# EAGLE board Exquisite Bombul-Kieran (EAGLE 9.7.0)

Size 82.4 x 356.69 mm. Coordinates in mm from the lower left corner, seen from the top.
Outline: 0,0 82.4,0 82.4,356.69 0,356.69 0,0
Copper layers (1*16): Top 0.035mm / dielectric 1.5mm / Bottom 0.035mm
Design rules "default": minimum track width 6mil, minimum drill 0.35mm, track to track 6mil, track to pad 6mil, pad to pad 6mil, via to via 6mil, smd to smd 6mil, copper to edge 40mil, drill to drill 6mil, minimum pad ring 10mil, minimum via ring 8mil, stop-mask expansion 4mil, vias tented up to drill 0mil, thermal gap 10mil

## Footprints (pad centres in the part's own frame; a part is rotated, then mirrored left to right if it is on the bottom)
LED-RGB-5MM = drill 0.9: B 0.635,0.635; C -0.635,-0.635; G 1.905,-0.635; R -1.905,0.635
RESAD1016W63L850D250B = drill 0.83 pad 1.43: 1 -5.08,0; 2 5.08,0
ARDUINO-UNO-R3-SHIELD = drill 1.016 pad 1.88: 3.3V 24.13,-2.54; 5V 24.13,0; A0 24.13,12.7; A1 24.13,15.24; A2 24.13,17.78; A3 24.13,20.32; A4 24.13,22.86; A5 24.13,25.4; AREF -24.13,-13.97; D2 -24.13,20.32; D3 -24.13,17.78; D4 -24.13,15.24; D5 -24.13,12.7; D6 -24.13,10.16; D7 -24.13,7.62; D8 -24.13,3.81; D9 -24.13,1.27; D10 -24.13,-1.27; D11 -24.13,-3.81; D12 -24.13,-6.35; D13 -24.13,-8.89; GND@0 24.13,2.54; GND@1 24.13,5.08; GND@2 -24.13,-11.43; IOREF 24.13,-7.62; NC 24.13,-10.16; RES 24.13,-5.08; RX -24.13,25.4; SCL -24.13,-19.05; SDA -24.13,-16.51; TX -24.13,22.86; VIN 24.13,7.62

## Placement (x,y rotation side)
D1  LED-RGBRCBG-PTH  [LED-RGB-5MM]  40.21,127.54 0 top
D2  LED-RGBRCBG-PTH  [LED-RGB-5MM]  30.05,125 0 top
D3  LED-RGBRCBG-PTH  [LED-RGB-5MM]  50.37,125 0 top
D4  LED-RGBRCBG-PTH  [LED-RGB-5MM]  19.89,122.46 0 top
D5  LED-RGBRCBG-PTH  [LED-RGB-5MM]  60.53,122.46 0 top
D6  LED-RGBRCBG-PTH  [LED-RGB-5MM]  39.81,182.43 0 top
D7  LED-RGBRCBG-PTH  [LED-RGB-5MM]  29.65,179.89 0 top
D8  LED-RGBRCBG-PTH  [LED-RGB-5MM]  49.97,179.89 0 top
D9  LED-RGBRCBG-PTH  [LED-RGB-5MM]  19.49,177.35 0 top
D10  LED-RGBRCBG-PTH  [LED-RGB-5MM]  60.13,177.35 0 top
D11  LED-RGBRCBG-PTH  [LED-RGB-5MM]  39.56,238.17 0 top
D12  LED-RGBRCBG-PTH  [LED-RGB-5MM]  29.4,235.63 0 top
D13  LED-RGBRCBG-PTH  [LED-RGB-5MM]  49.72,235.63 0 top
D14  LED-RGBRCBG-PTH  [LED-RGB-5MM]  19.24,233.09 0 top
D15  LED-RGBRCBG-PTH  [LED-RGB-5MM]  59.88,233.09 0 top
D16  LED-RGBRCBG-PTH  [LED-RGB-5MM]  39.34,293.56 0 top
D17  LED-RGBRCBG-PTH  [LED-RGB-5MM]  29.18,291.02 0 top
D18  LED-RGBRCBG-PTH  [LED-RGB-5MM]  49.5,291.02 0 top
D19  LED-RGBRCBG-PTH  [LED-RGB-5MM]  19.02,288.48 0 top
D20  LED-RGBRCBG-PTH  [LED-RGB-5MM]  59.66,288.48 0 top
D21  LED-RGBRCBG-PTH  [LED-RGB-5MM]  38.97,349.2 0 top
D22  LED-RGBRCBG-PTH  [LED-RGB-5MM]  28.81,346.66 0 top
D23  LED-RGBRCBG-PTH  [LED-RGB-5MM]  49.13,346.66 0 top
D24  LED-RGBRCBG-PTH  [LED-RGB-5MM]  18.65,344.12 0 top
D25  LED-RGBRCBG-PTH  [LED-RGB-5MM]  59.29,344.12 0 top
R1  220  [RESAD1016W63L850D250B]  64.34,114.84 90 top
R2  220  [RESAD1016W63L850D250B]  56.72,114.84 90 top
R3  220  [RESAD1016W63L850D250B]  46.56,114.84 90 top
R4  220  [RESAD1016W63L850D250B]  44.02,114.84 90 top
R5  220  [RESAD1016W63L850D250B]  54.18,114.84 90 top
R6  220  [RESAD1016W63L850D250B]  63.94,169.73 90 top
R7  220  [RESAD1016W63L850D250B]  53.78,169.73 90 top
R8  220  [RESAD1016W63L850D250B]  43.62,169.73 90 top
R9  220  [RESAD1016W63L850D250B]  33.46,169.73 90 top
R10  220  [RESAD1016W63L850D250B]  23.3,169.73 90 top
R11  220  [RESAD1016W63L850D250B]  63.69,225.47 90 top
R12  220  [RESAD1016W63L850D250B]  56.07,225.47 90 top
R13  220  [RESAD1016W63L850D250B]  53.53,225.47 90 top
R14  220  [RESAD1016W63L850D250B]  45.91,225.47 90 top
R15  220  [RESAD1016W63L850D250B]  43.37,225.47 90 top
R16  220  [RESAD1016W63L850D250B]  63.47,280.86 90 top
R17  220  [RESAD1016W63L850D250B]  53.31,280.86 90 top
R18  220  [RESAD1016W63L850D250B]  43.15,280.86 90 top
R19  220  [RESAD1016W63L850D250B]  32.99,280.86 90 top
R20  220  [RESAD1016W63L850D250B]  22.83,280.86 90 top
R21  220  [RESAD1016W63L850D250B]  63.1,336.5 90 top
R22  220  [RESAD1016W63L850D250B]  52.94,336.5 90 top
R23  220  [RESAD1016W63L850D250B]  42.78,336.5 90 top
R24  220  [RESAD1016W63L850D250B]  32.62,336.5 90 top
R25  220  [RESAD1016W63L850D250B]  22.46,336.5 90 top
R26  220  [RESAD1016W63L850D250B]  36.4,114.84 90 top
R27  220  [RESAD1016W63L850D250B]  33.86,114.84 90 top
R28  220  [RESAD1016W63L850D250B]  26.24,114.84 90 top
R29  220  [RESAD1016W63L850D250B]  23.7,114.84 90 top
R30  220  [RESAD1016W63L850D250B]  16.08,114.84 90 top
R31  220  [RESAD1016W63L850D250B]  15.68,169.73 90 top
R32  220  [RESAD1016W63L850D250B]  25.84,169.73 90 top
R33  220  [RESAD1016W63L850D250B]  36,169.73 90 top
R34  220  [RESAD1016W63L850D250B]  46.16,169.73 90 top
R35  220  [RESAD1016W63L850D250B]  56.32,169.73 90 top
R36  220  [RESAD1016W63L850D250B]  35.75,225.47 90 top
R37  220  [RESAD1016W63L850D250B]  33.21,225.47 90 top
R38  220  [RESAD1016W63L850D250B]  25.59,225.47 90 top
R39  220  [RESAD1016W63L850D250B]  23.05,225.47 90 top
R40  220  [RESAD1016W63L850D250B]  15.43,225.47 90 top
R41  220  [RESAD1016W63L850D250B]  15.21,280.86 90 top
R42  220  [RESAD1016W63L850D250B]  25.37,280.86 90 top
R43  220  [RESAD1016W63L850D250B]  35.53,280.86 90 top
R44  220  [RESAD1016W63L850D250B]  45.69,280.86 90 top
R45  220  [RESAD1016W63L850D250B]  55.85,280.86 90 top
R46  220  [RESAD1016W63L850D250B]  14.84,336.5 90 top
R47  220  [RESAD1016W63L850D250B]  25,336.5 90 top
R48  220  [RESAD1016W63L850D250B]  35.16,336.5 90 top
R49  220  [RESAD1016W63L850D250B]  45.32,336.5 90 top
R50  220  [RESAD1016W63L850D250B]  55.48,336.5 90 top
U1  ARDUINO-UNO-R3-SHIELD  [ARDUINO-UNO-R3-SHIELD]  47.88,29.84 270 top

## Library data of the parts
D1-D25 R1-R50 U1 = Tinkercad

## Nets
D1_G: D1.G R4.2
D1_R: D1.R R26.2
D2_G: D2.G R27.2
D2_R: D2.R R28.2
D3_G: D3.G R5.2
D3_R: D3.R R3.2
D4_G: D4.G R29.2
D4_R: D4.R R30.2
D5_G: D5.G R1.2
D5_R: D5.R R2.2
D6_G: D6.G R8.2
D6_R: D6.R R33.2
D7_G: D7.G R9.2
D7_R: D7.R R32.2
D8_G: D8.G R7.2
D8_R: D8.R R34.2
D9_G: D9.G R10.2
D9_R: D9.R R31.2
D10_G: D10.G R6.2
D10_R: D10.R R35.2
D11_G: D11.G R15.2
D11_R: D11.R R36.2
D12_G: D12.G R37.2
D12_R: D12.R R38.2
D13_G: D13.G R13.2
D13_R: D13.R R14.2
D14_G: D14.G R39.2
D14_R: D14.R R40.2
D15_G: D15.G R11.2
D15_R: D15.R R12.2
D16_G: D16.G R18.2
D16_R: D16.R R43.2
D17_G: D17.G R19.2
D17_R: D17.R R42.2
D18_G: D18.G R17.2
D18_R: D18.R R44.2
D19_G: D19.G R20.2
D19_R: D19.R R41.2
D20_G: D20.G R16.2
D20_R: D20.R R45.2
D21_G: D21.G R23.2
D21_R: D21.R R48.2
D22_G: D22.G R24.2
D22_R: D22.R R47.2
D23_G: D23.G R22.2
D23_R: D23.R R49.2
D24_G: D24.G R25.2
D24_R: D24.R R46.2
D25_G: D25.G R21.2
D25_R: D25.R R50.2
U1_D2: R2.1 R3.1 R26.1 R28.1 R30.1 U1.D2
U1_D3: R1.1 R4.1 R5.1 R27.1 R29.1 U1.D3
U1_D4: R31.1 R32.1 R33.1 R34.1 R35.1 U1.D4
U1_D5: R6.1 R7.1 R8.1 R9.1 R10.1 U1.D5
U1_D6: R12.1 R14.1 R36.1 R38.1 R40.1 U1.D6
U1_D7: R11.1 R13.1 R15.1 R37.1 R39.1 U1.D7
U1_D8: R41.1 R42.1 R43.1 R44.1 R45.1 U1.D8
U1_D9: R16.1 R17.1 R18.1 R19.1 R20.1 U1.D9
U1_D10: R46.1 R47.1 R48.1 R49.1 R50.1 U1.D10
U1_D11: R21.1 R22.1 R23.1 R24.1 R25.1 U1.D11
U1_GND: D1.C D2.C D3.C D4.C D5.C D6.C D7.C D8.C D9.C D10.C D11.C D12.C D13.C D14.C D15.C D16.C D17.C D18.C D19.C D20.C D21.C D22.C D23.C D24.C D25.C U1.GND@0 U1.GND@1 U1.GND@2

## Tracks (layer width: path | path; a pad name or v marks a point on that pad's centre or on a via)
D1_G  (1 unrouted)
D1_R  (1 unrouted)
D2_G  (1 unrouted)
D2_R  (1 unrouted)
D3_G  (1 unrouted)
D3_R  (1 unrouted)
D4_G  (1 unrouted)
D4_R  (1 unrouted)
D5_G  (1 unrouted)
D5_R  (1 unrouted)
D6_G  (1 unrouted)
D6_R  (1 unrouted)
D7_G  (1 unrouted)
D7_R  (1 unrouted)
D8_G  (1 unrouted)
D8_R  (1 unrouted)
D9_G  (1 unrouted)
D9_R  (1 unrouted)
D10_G  (1 unrouted)
D10_R  (1 unrouted)
D11_G  (1 unrouted)
D11_R  (1 unrouted)
D12_G  (1 unrouted)
D12_R  (1 unrouted)
D13_G  (1 unrouted)
D13_R  (1 unrouted)
D14_G  (1 unrouted)
D14_R  (1 unrouted)
D15_G  (1 unrouted)
D15_R  (1 unrouted)
D16_G  (1 unrouted)
D16_R  (1 unrouted)
D17_G  (1 unrouted)
D17_R  (1 unrouted)
D18_G  (1 unrouted)
D18_R  (1 unrouted)
D19_G  (1 unrouted)
D19_R  (1 unrouted)
D20_G  (1 unrouted)
D20_R  (1 unrouted)
D21_G  (1 unrouted)
D21_R  (1 unrouted)
D22_G  (1 unrouted)
D22_R  (1 unrouted)
D23_G  (1 unrouted)
D23_R  (1 unrouted)
D24_G  (1 unrouted)
D24_R  (1 unrouted)
D25_G  (1 unrouted)
D25_R  (1 unrouted)
U1_D2  (5 unrouted)
U1_D3  (5 unrouted)
U1_D4  (5 unrouted)
U1_D5  (5 unrouted)
U1_D6  (5 unrouted)
U1_D7  (5 unrouted)
U1_D8  (5 unrouted)
U1_D9  (5 unrouted)
U1_D10  (5 unrouted)
U1_D11  (5 unrouted)
U1_GND  (27 unrouted)